# EAGLE board MixerWider2 (EAGLE 5.10)
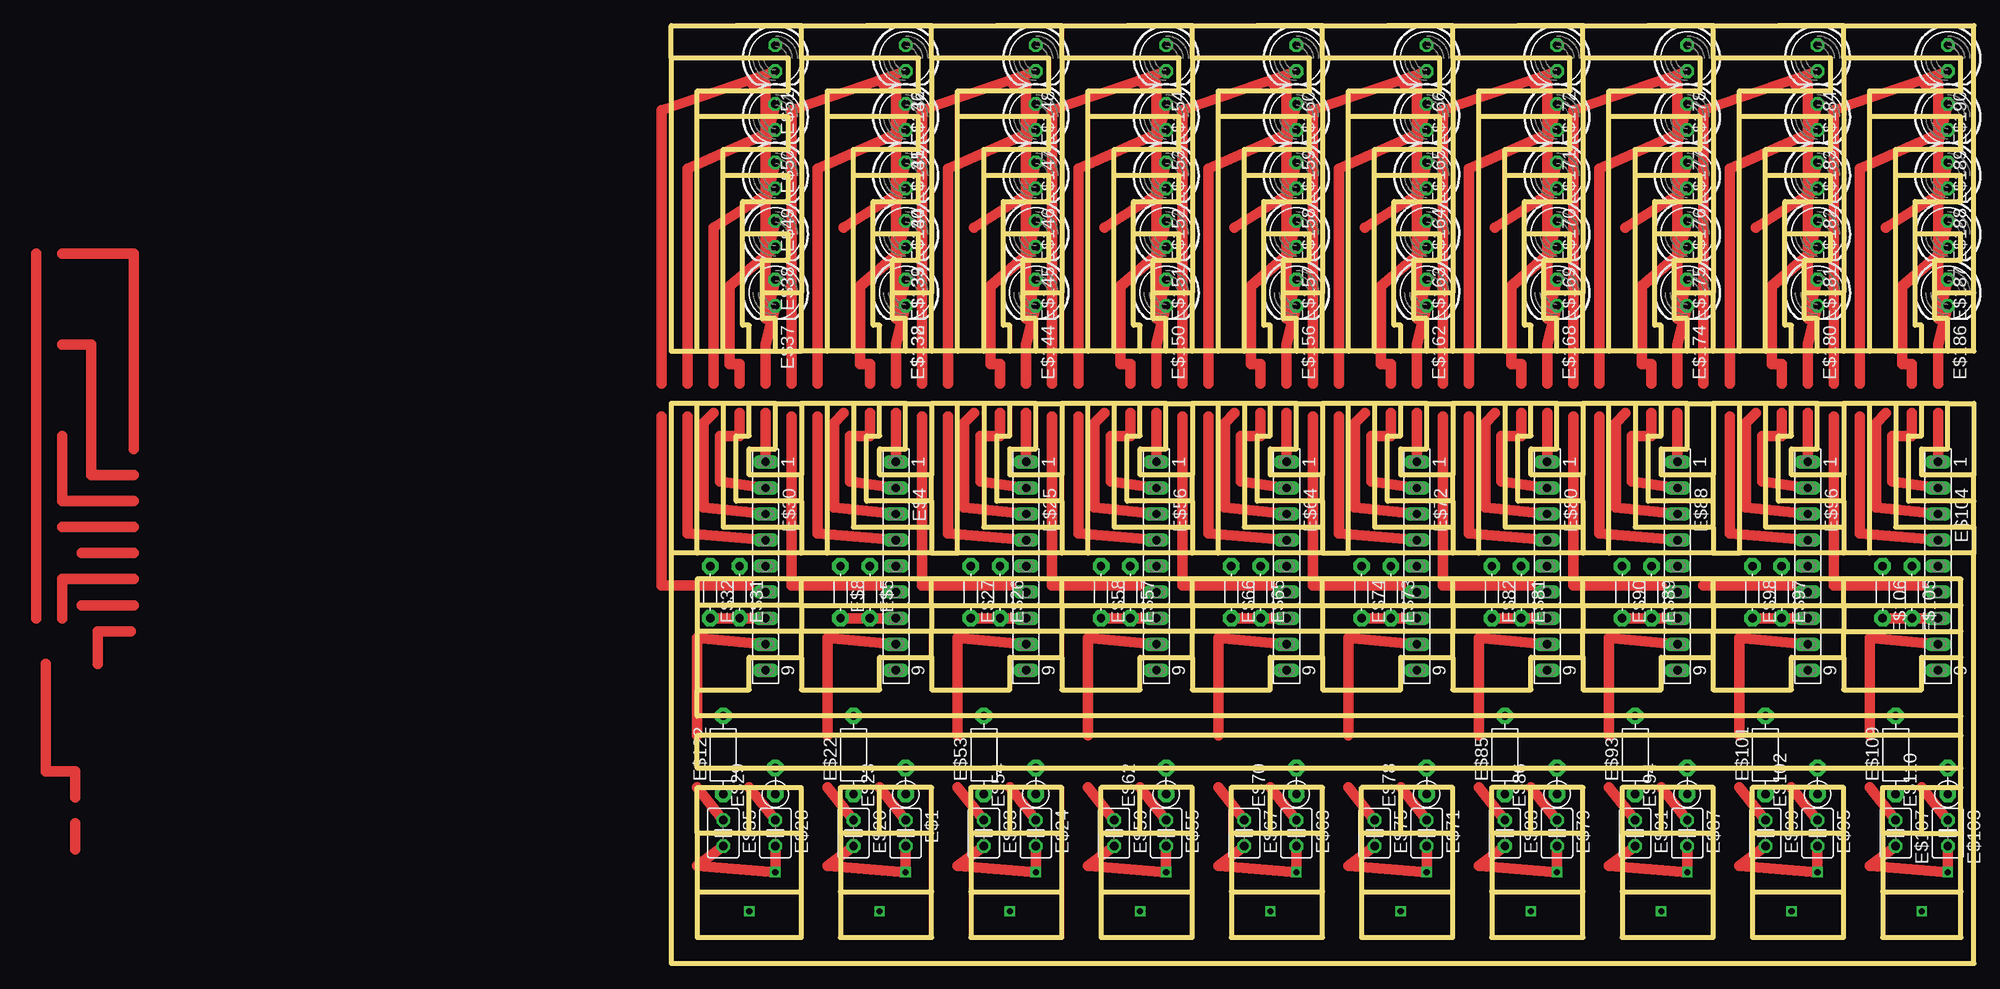
[diagram p0: board, top side]

Size 127 x 91.44 mm. Coordinates in mm from the lower left corner, seen from the top.
Outline: 2.54,59.69 0,59.69 0,88.27
Outline: 2.54,59.69 2.54,82.55
Outline: 2.54,82.55 2.54,85.09 11.43,85.09 11.43,88.27 0,88.27
Outline: 2.54,59.69 5.08,59.69
Outline: 5.08,59.69 5.08,76.83
Outline: 5.08,76.83 5.08,79.38 11.43,79.38 11.43,82.55 2.54,82.55
Outline: 5.08,59.69 7.62,59.69
Outline: 7.62,59.69 7.62,62.23 6.99,62.23 6.99,71.12
Outline: 6.99,71.12 6.99,74.3 11.43,74.3 11.43,76.83 5.08,76.83
Outline: 7.62,59.69 10.16,59.69
Outline: 10.16,59.69 10.16,62.86 8.89,62.86 8.89,65.41
Outline: 8.89,65.41 8.89,68.58 11.43,68.58 11.43,71.12 6.99,71.12
Outline: 10.16,59.69 12.7,59.69
Outline: 12.7,59.69 12.7,65.41
Outline: 6.35,91.44 12.7,91.44 12.7,88.27
Outline: 8.89,65.41 12.7,65.41
Outline: 15.24,59.69 15.24,82.55
Outline: 15.24,82.55 15.24,85.09 24.13,85.09 24.13,88.27 12.7,88.27
Outline: 12.7,88.27 12.7,65.41
Outline: 17.78,59.69 17.78,76.83
Outline: 17.78,76.83 17.78,79.38 24.13,79.38 24.13,82.55 15.24,82.55
Outline: 20.32,59.69 20.32,62.23 19.69,62.23 19.69,71.12
Outline: 19.69,71.12 19.69,74.3 24.13,74.3 24.13,76.83 17.78,76.83
Outline: 22.86,59.69 22.86,62.86 21.59,62.86 21.59,65.41
Outline: 21.59,65.41 21.59,68.58 24.13,68.58 24.13,71.12 19.69,71.12
Outline: 25.4,59.69 25.4,65.41
Outline: 19.05,91.44 25.4,91.44 25.4,88.27
Outline: 21.59,65.41 25.4,65.41
Outline: 27.94,59.69 27.94,82.55
Outline: 27.94,82.55 27.94,85.09 36.83,85.09 36.83,88.27 25.4,88.27
Outline: 25.4,88.27 25.4,65.41
Outline: 30.48,59.69 30.48,76.83
Outline: 30.48,76.83 30.48,79.38 36.83,79.38 36.83,82.55 27.94,82.55
Outline: 33.02,59.69 33.02,62.23 32.38,62.23 32.38,71.12
Outline: 32.38,71.12 32.38,74.3 36.83,74.3 36.83,76.83 30.48,76.83
Outline: 35.56,59.69 35.56,62.86 34.29,62.86 34.29,65.41
Outline: 34.29,65.41 34.29,68.58 36.83,68.58 36.83,71.12 32.38,71.12
Outline: 38.1,59.69 38.1,65.41
Outline: 31.75,91.44 38.1,91.44 38.1,88.27
Outline: 34.29,65.41 38.1,65.41
Outline: 40.64,59.69 40.64,82.55
Outline: 40.64,82.55 40.64,85.09 49.53,85.09 49.53,88.27 38.1,88.27
Outline: 38.1,88.27 38.1,65.41
Outline: 43.18,59.69 43.18,76.83
Outline: 43.18,76.83 43.18,79.38 49.53,79.38 49.53,82.55 40.64,82.55
Outline: 45.72,59.69 45.72,62.23 45.09,62.23 45.09,71.12
Outline: 45.09,71.12 45.09,74.3 49.53,74.3 49.53,76.83 43.18,76.83
Outline: 48.26,59.69 48.26,62.86 46.99,62.86 46.99,65.41
Outline: 46.99,65.41 46.99,68.58 49.53,68.58 49.53,71.12 45.09,71.12
Outline: 50.8,59.69 50.8,65.41
Outline: 44.45,91.44 50.8,91.44 50.8,88.27
Outline: 46.99,65.41 50.8,65.41
Outline: 53.34,59.69 53.34,82.55
Outline: 53.34,82.55 53.34,85.09 62.23,85.09 62.23,88.27 50.8,88.27
Outline: 50.8,88.27 50.8,65.41
Outline: 55.88,59.69 55.88,76.83
Outline: 55.88,76.83 55.88,79.38 62.23,79.38 62.23,82.55 53.34,82.55
Outline: 58.42,59.69 58.42,62.23 57.79,62.23 57.79,71.12
Outline: 57.79,71.12 57.79,74.3 62.23,74.3 62.23,76.83 55.88,76.83
Outline: 60.96,59.69 60.96,62.86 59.69,62.86 59.69,65.41
Outline: 59.69,65.41 59.69,68.58 62.23,68.58 62.23,71.12 57.79,71.12
Outline: 63.5,59.69 63.5,65.41
Outline: 57.15,91.44 63.5,91.44 63.5,88.27
Outline: 59.69,65.41 63.5,65.41
Outline: 66.04,59.69 66.04,82.55
Outline: 66.04,82.55 66.04,85.09 74.93,85.09 74.93,88.27 63.5,88.27
Outline: 63.5,88.27 63.5,65.41
Outline: 68.58,59.69 68.58,76.83
Outline: 68.58,76.83 68.58,79.38 74.93,79.38 74.93,82.55 66.04,82.55
Outline: 71.12,59.69 71.12,62.23 70.48,62.23 70.48,71.12
Outline: 70.48,71.12 70.48,74.3 74.93,74.3 74.93,76.83 68.58,76.83
Outline: 73.66,59.69 73.66,62.86 72.39,62.86 72.39,65.41
Outline: 72.39,65.41 72.39,68.58 74.93,68.58 74.93,71.12 70.48,71.12
Outline: 76.2,59.69 76.2,65.41
Outline: 69.85,91.44 76.2,91.44 76.2,88.27
Outline: 72.39,65.41 76.2,65.41
Outline: 78.74,59.69 78.74,82.55
Outline: 78.74,82.55 78.74,85.09 87.63,85.09 87.63,88.27 76.2,88.27
Outline: 76.2,88.27 76.2,65.41
Outline: 81.28,59.69 81.28,76.83
Outline: 81.28,76.83 81.28,79.38 87.63,79.38 87.63,82.55 78.74,82.55
Outline: 83.82,59.69 83.82,62.23 83.19,62.23 83.19,71.12
Outline: 83.19,71.12 83.19,74.3 87.63,74.3 87.63,76.83 81.28,76.83
Outline: 86.36,59.69 86.36,62.86 85.09,62.86 85.09,65.41
Outline: 85.09,65.41 85.09,68.58 87.63,68.58 87.63,71.12 83.19,71.12
Outline: 88.9,59.69 88.9,65.41
Outline: 82.55,91.44 88.9,91.44 88.9,88.27
Outline: 85.09,65.41 88.9,65.41
Outline: 91.44,59.69 91.44,82.55
Outline: 91.44,82.55 91.44,85.09 100.33,85.09 100.33,88.27 88.9,88.27
Outline: 88.9,88.27 88.9,65.41
Outline: 93.98,59.69 93.98,76.83
Outline: 93.98,76.83 93.98,79.38 100.33,79.38 100.33,82.55 91.44,82.55
Outline: 96.52,59.69 96.52,62.23 95.89,62.23 95.89,71.12
Outline: 95.89,71.12 95.89,74.3 100.33,74.3 100.33,76.83 93.98,76.83
Outline: 99.06,59.69 99.06,62.86 97.79,62.86 97.79,65.41
Outline: 97.79,65.41 97.79,68.58 100.33,68.58 100.33,71.12 95.89,71.12
Outline: 101.6,59.69 101.6,65.41
Outline: 95.25,91.44 101.6,91.44 101.6,88.27
Outline: 97.79,65.41 101.6,65.41
Outline: 104.14,59.69 104.14,82.55
Outline: 104.14,82.55 104.14,85.09 113.03,85.09 113.03,88.27 101.6,88.27
Outline: 101.6,88.27 101.6,65.41
Outline: 106.68,59.69 106.68,76.83
Outline: 106.68,76.83 106.68,79.38 113.03,79.38 113.03,82.55 104.14,82.55
Outline: 109.22,59.69 109.22,62.23 108.59,62.23 108.59,71.12
Outline: 108.59,71.12 108.59,74.3 113.03,74.3 113.03,76.83 106.68,76.83
Outline: 111.76,59.69 111.76,62.86 110.49,62.86 110.49,65.41
Outline: 110.49,65.41 110.49,68.58 113.03,68.58 113.03,71.12 108.59,71.12
Outline: 114.3,59.69 114.3,65.41
Outline: 107.95,91.44 114.3,91.44 114.3,88.27
Outline: 110.49,65.41 114.3,65.41
Outline: 116.84,59.69 116.84,82.55
Outline: 116.84,82.55 116.84,85.09 125.73,85.09 125.73,88.27 114.3,88.27
Outline: 114.3,88.27 114.3,65.41
Outline: 119.38,59.69 119.38,76.83
Outline: 119.38,76.83 119.38,79.38 125.73,79.38 125.73,82.55 116.84,82.55
Outline: 121.92,59.69 121.92,62.23 121.29,62.23 121.29,71.12
Outline: 121.29,71.12 121.29,74.3 125.73,74.3 125.73,76.83 119.38,76.83
Outline: 124.46,59.69 124.46,62.86 123.19,62.86 123.19,65.41
Outline: 123.19,65.41 123.19,68.58 125.73,68.58 125.73,71.12 121.29,71.12
Outline: 127,65.41 127,59.69 12.7,59.69
Outline: 127,65.41 127,91.44 0,91.44 0,88.27
Outline: 123.19,65.41 127,65.41
Outline: 2.54,12.7 2.54,6.98
Outline: 2.54,6.98 12.7,6.98
Outline: 12.7,12.7 7.62,12.7
Outline: 7.62,12.7 2.54,12.7
Outline: 2.54,12.7 2.54,17.14 7.62,17.14
Outline: 7.62,17.14 12.7,17.14 12.7,12.7
Outline: 12.7,29.85 7.62,29.85 7.62,26.67 2.54,26.67
Outline: 12.7,29.85 12.7,32.38
Outline: 12.7,34.92 12.7,37.46
Outline: 12.7,37.46 2.54,37.46 2.54,34.92
Outline: 2.54,40 2.54,54.61
Outline: 2.54,54.61 0,54.61 0,40
Outline: 5.08,54.61 2.54,54.61
Outline: 5.08,54.61 5.08,42.54 12.7,42.54
Outline: 12.7,42.54 12.7,40
Outline: 12.7,40 2.54,40
Outline: 12.7,45.09 6.35,45.09 6.35,51.43 7.62,51.43 7.62,54.61
Outline: 7.62,54.61 5.08,54.61
Outline: 12.7,45.09 12.7,47.62
Outline: 12.7,47.62 7.62,47.62 7.62,50.16 10.16,50.16 10.16,54.61
Outline: 10.16,54.61 7.62,54.61
Outline: 10.16,54.61 12.7,54.61
Outline: 12.7,54.61 12.7,47.62
Outline: 7.62,12.7 7.62,17.14
Outline: 0,40 0,0 127,0 127,40
Outline: 12.7,6.98 12.7,12.7
Outline: 2.54,6.98 2.54,2.54 12.7,2.54 12.7,6.98
Outline: 16.51,12.7 16.51,6.98
Outline: 16.51,6.98 25.4,6.98
Outline: 25.4,12.7 20.32,12.7
Outline: 20.32,12.7 16.51,12.7
Outline: 16.51,12.7 16.51,17.14 20.32,17.14
Outline: 25.4,29.85 20.32,29.85 20.32,26.67 12.7,26.67 12.7,29.85
Outline: 25.4,29.85 25.4,32.38
Outline: 25.4,32.38 12.7,32.38
Outline: 12.7,34.92 25.4,34.92
Outline: 25.4,34.92 25.4,37.46
Outline: 15.24,40 15.24,54.61
Outline: 15.24,54.61 12.7,54.61
Outline: 12.7,45.09 12.7,42.54
Outline: 17.78,54.61 15.24,54.61
Outline: 17.78,54.61 17.78,42.54 25.4,42.54
Outline: 25.4,42.54 25.4,40
Outline: 25.4,40 15.24,40
Outline: 25.4,45.09 19.05,45.09 19.05,51.43 20.32,51.43 20.32,54.61
Outline: 20.32,54.61 17.78,54.61
Outline: 25.4,45.09 25.4,47.62
Outline: 25.4,47.62 20.32,47.62 20.32,50.16 22.86,50.16 22.86,54.61
Outline: 22.86,54.61 20.32,54.61
Outline: 22.86,54.61 25.4,54.61
Outline: 25.4,54.61 25.4,47.62
Outline: 20.32,12.7 20.32,17.14
Outline: 12.7,34.92 12.7,32.38
Outline: 25.4,6.98 25.4,12.7
Outline: 25.4,12.7 25.4,17.14 20.32,17.14
Outline: 16.51,6.98 16.51,2.54 25.4,2.54 25.4,6.98
Outline: 29.21,12.7 29.21,6.98
Outline: 29.21,6.98 38.1,6.98
Outline: 38.1,12.7 33.02,12.7
Outline: 33.02,12.7 29.21,12.7
Outline: 29.21,12.7 29.21,17.14 33.02,17.14
Outline: 38.1,29.85 33.02,29.85 33.02,26.67 25.4,26.67 25.4,29.85
Outline: 38.1,29.85 38.1,32.38
Outline: 38.1,32.38 25.4,32.38
Outline: 25.4,34.92 38.1,34.92
Outline: 38.1,34.92 38.1,37.46
Outline: 27.94,40 27.94,54.61
Outline: 27.94,54.61 25.4,54.61
Outline: 25.4,45.09 25.4,42.54
Outline: 30.48,54.61 27.94,54.61
Outline: 30.48,54.61 30.48,42.54 38.1,42.54
Outline: 38.1,42.54 38.1,40
Outline: 38.1,40 27.94,40
Outline: 38.1,45.09 31.75,45.09 31.75,51.43 33.02,51.43 33.02,54.61
Outline: 33.02,54.61 30.48,54.61
Outline: 38.1,45.09 38.1,47.62
Outline: 38.1,47.62 33.02,47.62 33.02,50.16 35.56,50.16 35.56,54.61
Outline: 35.56,54.61 33.02,54.61
Outline: 35.56,54.61 38.1,54.61
Outline: 38.1,54.61 38.1,47.62
Outline: 33.02,12.7 33.02,17.14
Outline: 25.4,34.92 25.4,32.38
Outline: 38.1,6.98 38.1,12.7
Outline: 38.1,12.7 38.1,17.14 33.02,17.14
Outline: 29.21,6.98 29.21,2.54 38.1,2.54 38.1,6.98
Outline: 41.91,12.7 41.91,6.98
Outline: 41.91,6.98 50.8,6.98
Outline: 50.8,12.7 45.72,12.7
Outline: 45.72,12.7 41.91,12.7
Outline: 41.91,12.7 41.91,17.14 45.72,17.14
Outline: 50.8,29.85 45.72,29.85 45.72,26.67 38.1,26.67 38.1,29.85
Outline: 50.8,29.85 50.8,32.38
Outline: 50.8,32.38 38.1,32.38
Outline: 38.1,34.92 50.8,34.92
Outline: 50.8,34.92 50.8,37.46
Outline: 40.64,40 40.64,54.61
Outline: 40.64,54.61 38.1,54.61
Outline: 38.1,45.09 38.1,42.54
Outline: 43.18,54.61 40.64,54.61
Outline: 43.18,54.61 43.18,42.54 50.8,42.54
Outline: 50.8,42.54 50.8,40
Outline: 50.8,40 40.64,40
Outline: 50.8,45.09 44.45,45.09 44.45,51.43 45.72,51.43 45.72,54.61
Outline: 45.72,54.61 43.18,54.61
Outline: 50.8,45.09 50.8,47.62
Outline: 50.8,47.62 45.72,47.62 45.72,50.16 48.26,50.16 48.26,54.61
Outline: 48.26,54.61 45.72,54.61
Outline: 48.26,54.61 50.8,54.61
Outline: 50.8,54.61 50.8,47.62
Outline: 45.72,12.7 45.72,17.14
Outline: 38.1,34.92 38.1,32.38
Outline: 50.8,6.98 50.8,12.7
Outline: 50.8,12.7 50.8,17.14 45.72,17.14
Outline: 41.91,6.98 41.91,2.54 50.8,2.54 50.8,6.98
Outline: 54.61,12.7 54.61,6.98
Outline: 54.61,6.98 63.5,6.98
Outline: 63.5,12.7 58.42,12.7
Outline: 58.42,12.7 54.61,12.7
Outline: 54.61,12.7 54.61,17.14 58.42,17.14
Outline: 63.5,29.85 58.42,29.85 58.42,26.67 50.8,26.67 50.8,29.85
Outline: 63.5,29.85 63.5,32.38
Outline: 63.5,32.38 50.8,32.38
Outline: 50.8,34.92 63.5,34.92
Outline: 63.5,34.92 63.5,37.46
Outline: 53.34,40 53.34,54.61
Outline: 53.34,54.61 50.8,54.61
Outline: 50.8,45.09 50.8,42.54
Outline: 55.88,54.61 53.34,54.61
Outline: 55.88,54.61 55.88,42.54 63.5,42.54
Outline: 63.5,42.54 63.5,40
Outline: 63.5,40 53.34,40
Outline: 63.5,45.09 57.15,45.09 57.15,51.43 58.42,51.43 58.42,54.61
Outline: 58.42,54.61 55.88,54.61
Outline: 63.5,45.09 63.5,47.62
Outline: 63.5,47.62 58.42,47.62 58.42,50.16 60.96,50.16 60.96,54.61
Outline: 60.96,54.61 58.42,54.61
Outline: 60.96,54.61 63.5,54.61
Outline: 63.5,54.61 63.5,47.62
Outline: 58.42,12.7 58.42,17.14
Outline: 50.8,34.92 50.8,32.38
Outline: 63.5,6.98 63.5,12.7
Outline: 63.5,12.7 63.5,17.14 58.42,17.14
Outline: 54.61,6.98 54.61,2.54 63.5,2.54 63.5,6.98
Outline: 67.31,12.7 67.31,6.98
Outline: 67.31,6.98 76.2,6.98
Outline: 76.2,12.7 71.12,12.7
Outline: 71.12,12.7 67.31,12.7
Outline: 67.31,12.7 67.31,17.14 71.12,17.14
Outline: 76.2,29.85 71.12,29.85 71.12,26.67 63.5,26.67 63.5,29.85
Outline: 76.2,29.85 76.2,32.38
Outline: 76.2,32.38 63.5,32.38
Outline: 63.5,34.92 76.2,34.92
Outline: 76.2,34.92 76.2,37.46
Outline: 66.04,40 66.04,54.61
Outline: 66.04,54.61 63.5,54.61
Outline: 63.5,45.09 63.5,42.54
Outline: 68.58,54.61 66.04,54.61
Outline: 68.58,54.61 68.58,42.54 76.2,42.54
Outline: 76.2,42.54 76.2,40
Outline: 76.2,40 66.04,40
Outline: 76.2,45.09 69.85,45.09 69.85,51.43 71.12,51.43 71.12,54.61
Outline: 71.12,54.61 68.58,54.61
Outline: 76.2,45.09 76.2,47.62
Outline: 76.2,47.62 71.12,47.62 71.12,50.16 73.66,50.16 73.66,54.61
Outline: 73.66,54.61 71.12,54.61
Outline: 73.66,54.61 76.2,54.61
Outline: 76.2,54.61 76.2,47.62
Outline: 71.12,12.7 71.12,17.14
Outline: 63.5,34.92 63.5,32.38
Outline: 76.2,6.98 76.2,12.7
Outline: 76.2,12.7 76.2,17.14 71.12,17.14
Outline: 67.31,6.98 67.31,2.54 76.2,2.54 76.2,6.98
Outline: 80.01,12.7 80.01,6.98
Outline: 80.01,6.98 88.9,6.98
Outline: 88.9,12.7 83.82,12.7
Outline: 83.82,12.7 80.01,12.7
Outline: 80.01,12.7 80.01,17.14 83.82,17.14
Outline: 88.9,29.85 83.82,29.85 83.82,26.67 76.2,26.67 76.2,29.85
Outline: 88.9,29.85 88.9,32.38
Outline: 88.9,32.38 76.2,32.38
Outline: 76.2,34.92 88.9,34.92
Outline: 88.9,34.92 88.9,37.46
Outline: 78.74,40 78.74,54.61
Outline: 78.74,54.61 76.2,54.61
Outline: 76.2,45.09 76.2,42.54
Outline: 81.28,54.61 78.74,54.61
Outline: 81.28,54.61 81.28,42.54 88.9,42.54
Outline: 88.9,42.54 88.9,40
Outline: 88.9,40 78.74,40
Outline: 88.9,45.09 82.55,45.09 82.55,51.43 83.82,51.43 83.82,54.61
Outline: 83.82,54.61 81.28,54.61
Outline: 88.9,45.09 88.9,47.62
Outline: 88.9,47.62 83.82,47.62 83.82,50.16 86.36,50.16 86.36,54.61
Outline: 86.36,54.61 83.82,54.61
Outline: 86.36,54.61 88.9,54.61
Outline: 88.9,54.61 88.9,47.62
Outline: 83.82,12.7 83.82,17.14
Outline: 76.2,34.92 76.2,32.38
Outline: 88.9,6.98 88.9,12.7
Outline: 88.9,12.7 88.9,17.14 83.82,17.14
Outline: 80.01,6.98 80.01,2.54 88.9,2.54 88.9,6.98
Outline: 92.71,12.7 92.71,6.98
Outline: 92.71,6.98 101.6,6.98
Outline: 101.6,12.7 96.52,12.7
Outline: 96.52,12.7 92.71,12.7
Outline: 92.71,12.7 92.71,17.14 96.52,17.14
Outline: 101.6,29.85 96.52,29.85 96.52,26.67 88.9,26.67 88.9,29.85
Outline: 101.6,29.85 101.6,32.38
Outline: 101.6,32.38 88.9,32.38
Outline: 88.9,34.92 101.6,34.92
Outline: 101.6,34.92 101.6,32.38
Outline: 101.6,34.92 101.6,37.46
Outline: 91.44,40 91.44,54.61
Outline: 91.44,54.61 88.9,54.61
Outline: 88.9,45.09 88.9,42.54
Outline: 93.98,54.61 91.44,54.61
Outline: 93.98,54.61 93.98,42.54 101.6,42.54
Outline: 101.6,42.54 101.6,40
Outline: 101.6,40 91.44,40
Outline: 101.6,42.54 101.6,45.09
Outline: 101.6,45.09 95.25,45.09 95.25,51.43 96.52,51.43 96.52,54.61
Outline: 96.52,54.61 93.98,54.61
Outline: 101.6,45.09 101.6,47.62
Outline: 101.6,47.62 96.52,47.62 96.52,50.16 99.06,50.16 99.06,54.61
Outline: 99.06,54.61 96.52,54.61
Outline: 99.06,54.61 101.6,54.61
Outline: 101.6,54.61 101.6,47.62
Outline: 96.52,12.7 96.52,17.14
Outline: 88.9,34.92 88.9,32.38
Outline: 101.6,6.98 101.6,12.7
Outline: 101.6,12.7 101.6,17.14 96.52,17.14
Outline: 92.71,6.98 92.71,2.54 101.6,2.54 101.6,6.98
Outline: 105.41,12.7 105.41,6.98
Outline: 105.41,6.98 114.3,6.98
Outline: 114.3,12.7 109.22,12.7
Outline: 109.22,12.7 105.41,12.7
Outline: 105.41,12.7 105.41,17.14 109.22,17.14
Outline: 114.3,29.85 109.22,29.85 109.22,26.67 101.6,26.67 101.6,29.85
Outline: 114.3,29.85 114.3,32.38
Outline: 114.3,32.38 101.6,32.38
Outline: 101.6,34.92 114.3,34.92
Outline: 114.3,34.92 114.3,37.46
Outline: 106.68,54.61 104.14,54.61
Outline: 106.68,54.61 106.68,42.54 114.3,42.54
Outline: 114.3,42.54 114.3,40
Outline: 114.3,40 104.14,40
Outline: 114.3,45.09 107.95,45.09 107.95,51.43 109.22,51.43 109.22,54.61
Outline: 109.22,54.61 106.68,54.61
Outline: 114.3,45.09 114.3,47.62
Outline: 114.3,47.62 109.22,47.62 109.22,50.16 111.76,50.16 111.76,54.61
Outline: 111.76,54.61 109.22,54.61
Outline: 111.76,54.61 114.3,54.61
Outline: 114.3,54.61 114.3,47.62
Outline: 109.22,12.7 109.22,17.14
Outline: 114.3,6.98 114.3,12.7
Outline: 114.3,12.7 114.3,17.14 109.22,17.14
Outline: 105.41,6.98 105.41,2.54 114.3,2.54 114.3,6.98
Outline: 118.11,12.7 118.11,6.98
Outline: 121.92,12.7 118.11,12.7
Outline: 118.11,12.7 118.11,17.14 121.92,17.14
Outline: 121.92,17.14 125.73,17.14
Outline: 116.84,40 116.84,54.61
Outline: 116.84,54.61 114.3,54.61
Outline: 114.3,45.09 114.3,42.54
Outline: 119.38,54.61 116.84,54.61
Outline: 119.38,54.61 119.38,42.54 127,42.54
Outline: 127,42.54 127,40
Outline: 127,40 116.84,40
Outline: 127,42.54 127,45.09
Outline: 127,45.09 120.65,45.09 120.65,51.43 121.92,51.43 121.92,54.61
Outline: 121.92,54.61 119.38,54.61
Outline: 127,45.09 127,47.62
Outline: 127,47.62 121.92,47.62 121.92,50.16 124.46,50.16 124.46,54.61
Outline: 124.46,54.61 121.92,54.61
Outline: 124.46,54.61 127,54.61 127,47.62
Outline: 121.92,12.7 121.92,17.14
Outline: 114.3,34.92 114.3,32.38
Outline: 114.3,29.85 114.3,26.67 121.92,26.67 121.92,29.85 125.73,29.85
Outline: 125.73,22.23 2.54,22.23 2.54,19.05 125.73,19.05
Outline: 118.11,6.98 118.11,2.54 125.73,2.54 125.73,6.98
Outline: 104.14,54.61 101.6,54.61
Outline: 125.73,6.98 125.73,12.7
Outline: 125.73,12.7 125.73,17.14
Outline: 118.11,6.98 125.73,6.98
Outline: 121.92,12.7 125.73,12.7
Outline: 125.73,17.14 125.73,19.05
Outline: 125.73,19.05 125.73,22.23
Outline: 125.73,22.23 125.73,24.13
Outline: 125.73,24.13 125.73,29.85
Outline: 125.73,29.85 125.73,32.38
Outline: 125.73,32.38 125.73,34.92
Outline: 125.73,34.92 125.73,37.46 114.3,37.46
Outline: 114.3,34.92 125.73,34.92
Outline: 114.3,32.38 125.73,32.38
Outline: 116.84,40 114.3,40
Outline: 114.3,37.46 101.6,37.46
Outline: 101.6,40 104.14,40
Outline: 104.14,54.61 104.14,40
Outline: 91.44,40 88.9,40
Outline: 101.6,37.46 88.9,37.46
Outline: 88.9,37.46 76.2,37.46
Outline: 78.74,40 76.2,40
Outline: 63.5,40 66.04,40
Outline: 76.2,37.46 63.5,37.46
Outline: 53.34,40 50.8,40
Outline: 63.5,37.46 50.8,37.46
Outline: 40.64,40 38.1,40
Outline: 50.8,37.46 38.1,37.46
Outline: 38.1,37.46 25.4,37.46
Outline: 25.4,40 27.94,40
Outline: 25.4,37.46 12.7,37.46
Outline: 15.24,40 12.7,40
Outline: 2.54,40 0,40
Outline: 2.54,34.92 2.54,32.38
Outline: 2.54,32.38 2.54,26.67
Outline: 12.7,32.38 2.54,32.38
Outline: 12.7,34.92 2.54,34.92
Outline: 125.73,24.13 2.54,24.13 2.54,26.67
Copper layers (1*16): Top 0.035mm / dielectric 1.5mm / Bottom 0.035mm
Design rules "default": minimum track width 10mil, minimum drill 24mil, track to track 8mil, track to pad 8mil, pad to pad 8mil, via to via 8mil, smd to smd 8mil, copper to edge 40mil, drill to drill 8mil, minimum pad ring 10mil, minimum via ring 8mil, stop-mask expansion 4mil, vias tented up to drill 0mil, thermal gap 10mil

## Footprints (pad centres in the part's own frame; a part is rotated, then mirrored left to right if it is on the bottom)
C025-030X050 = drill 0.813 octagon: 1 -1.27,0; 2 1.27,0
FE09 = drill 0.813 long: 1 -10.16,0; 2 -7.62,0; 3 -5.08,0; 4 -2.54,0; 5 0,0; 6 2.54,0; 7 5.08,0; 8 7.62,0; 9 10.16,0
R-5 = drill 0.813 pad 1.6 octagon: 1 -2.54,0; 2 2.54,0
R-7,5 = drill 0.813 pad 1.6 octagon: 1 -3.81,0; 2 3.81,0
RS-2,5 = drill 0.813 pad 1.6 octagon: 1 -1.27,0; 2 1.27,0
LED5MM = drill 0.813 octagon: A -1.27,0; K 1.27,0

## Placement (x,y rotation side)
E$1  [C025-030X050]  22.86,12.7 270 top
E$4  [FE09]  21.91,38.73 270 top
E$5  [R-5]  19.37,36.2 270 top
E$8  [R-5]  16.51,36.2 270 top
E$20  [C025-030X050]  17.78,12.7 270 top
E$22  [R-7,5]  17.78,20.32 90 top
E$23  [RS-2,5]  22.86,17.78 90 top
E$24  [C025-030X050]  35.56,12.7 270 top
E$25  [FE09]  34.61,38.73 270 top
E$26  [R-5]  32.07,36.2 270 top
E$27  [R-5]  29.21,36.2 270 top
E$28  [C025-030X050]  10.16,12.7 270 top
E$29  [RS-2,5]  10.16,17.78 90 top
E$30  [FE09]  9.21,38.73 270 top
E$31  [R-5]  6.67,36.2 270 top
E$32  [R-5]  3.81,36.2 270 top
E$33  [C025-030X050]  30.48,12.7 270 top
E$35  [C025-030X050]  5.08,12.7 270 top
E$37  [LED5MM]  10.16,65.41 270 top
E$38  [LED5MM]  10.16,71.12 270 top
E$49  [LED5MM]  10.16,76.83 270 top
E$50  [LED5MM]  10.16,82.55 270 top
E$51  [LED5MM]  10.16,88.27 270 top
E$53  [R-7,5]  30.48,20.32 90 top
E$54  [RS-2,5]  35.56,17.78 90 top
E$55  [C025-030X050]  48.26,12.7 270 top
E$56  [FE09]  47.31,38.73 270 top
E$57  [R-5]  44.77,36.2 270 top
E$58  [R-5]  41.91,36.2 270 top
E$59  [C025-030X050]  43.18,12.7 270 top
E$62  [RS-2,5]  48.26,17.78 90 top
E$63  [C025-030X050]  60.96,12.7 270 top
E$64  [FE09]  60.01,38.73 270 top
E$65  [R-5]  57.47,36.2 270 top
E$66  [R-5]  54.61,36.2 270 top
E$67  [C025-030X050]  55.88,12.7 270 top
E$70  [RS-2,5]  60.96,17.78 90 top
E$71  [C025-030X050]  73.66,12.7 270 top
E$72  [FE09]  72.71,38.73 270 top
E$73  [R-5]  70.17,36.2 270 top
E$74  [R-5]  67.31,36.2 270 top
E$75  [C025-030X050]  68.58,12.7 270 top
E$78  [RS-2,5]  73.66,17.78 90 top
E$79  [C025-030X050]  86.36,12.7 270 top
E$80  [FE09]  85.41,38.73 270 top
E$81  [R-5]  82.87,36.2 270 top
E$82  [R-5]  80.01,36.2 270 top
E$83  [C025-030X050]  81.28,12.7 270 top
E$85  [R-7,5]  81.28,20.32 90 top
E$86  [RS-2,5]  86.36,17.78 90 top
E$87  [C025-030X050]  99.06,12.7 270 top
E$88  [FE09]  98.11,38.73 270 top
E$89  [R-5]  95.57,36.2 270 top
E$90  [R-5]  92.71,36.2 270 top
E$91  [C025-030X050]  93.98,12.7 270 top
E$93  [R-7,5]  93.98,20.32 90 top
E$94  [RS-2,5]  99.06,17.78 90 top
E$95  [C025-030X050]  111.76,12.7 270 top
E$96  [FE09]  110.81,38.73 270 top
E$97  [R-5]  108.27,36.2 270 top
E$98  [R-5]  105.41,36.2 270 top
E$99  [C025-030X050]  106.68,12.7 270 top
E$101  [R-7,5]  106.68,20.32 90 top
E$102  [RS-2,5]  111.76,17.78 90 top
E$103  [C025-030X050]  124.46,12.7 270 top
E$104  [FE09]  123.51,38.73 270 top
E$105  [R-5]  120.97,36.2 270 top
E$106  [R-5]  118.11,36.2 270 top
E$107  [C025-030X050]  119.38,12.7 270 top
E$109  [R-7,5]  119.38,20.32 90 top
E$110  [RS-2,5]  124.46,17.78 90 top
E$122  [R-7,5]  5.08,20.32 90 top
E$132  [LED5MM]  22.86,65.41 270 top
E$133  [LED5MM]  22.86,71.12 270 top
E$134  [LED5MM]  22.86,76.83 270 top
E$135  [LED5MM]  22.86,82.55 270 top
E$136  [LED5MM]  22.86,88.27 270 top
E$138  [LED5MM]  22.86,65.41 270 top
E$139  [LED5MM]  22.86,71.12 270 top
E$140  [LED5MM]  22.86,76.83 270 top
E$141  [LED5MM]  22.86,82.55 270 top
E$142  [LED5MM]  22.86,88.27 270 top
E$144  [LED5MM]  35.56,65.41 270 top
E$145  [LED5MM]  35.56,71.12 270 top
E$146  [LED5MM]  35.56,76.83 270 top
E$147  [LED5MM]  35.56,82.55 270 top
E$148  [LED5MM]  35.56,88.27 270 top
E$150  [LED5MM]  48.26,65.41 270 top
E$151  [LED5MM]  48.26,71.12 270 top
E$152  [LED5MM]  48.26,76.83 270 top
E$153  [LED5MM]  48.26,82.55 270 top
E$154  [LED5MM]  48.26,88.27 270 top
E$156  [LED5MM]  60.96,65.41 270 top
E$157  [LED5MM]  60.96,71.12 270 top
E$158  [LED5MM]  60.96,76.83 270 top
E$159  [LED5MM]  60.96,82.55 270 top
E$160  [LED5MM]  60.96,88.27 270 top
E$162  [LED5MM]  73.66,65.41 270 top
E$163  [LED5MM]  73.66,71.12 270 top
E$164  [LED5MM]  73.66,76.83 270 top
E$165  [LED5MM]  73.66,82.55 270 top
E$166  [LED5MM]  73.66,88.27 270 top
E$168  [LED5MM]  86.36,65.41 270 top
E$169  [LED5MM]  86.36,71.12 270 top
E$170  [LED5MM]  86.36,76.83 270 top
E$171  [LED5MM]  86.36,82.55 270 top
E$172  [LED5MM]  86.36,88.27 270 top
E$174  [LED5MM]  99.06,65.41 270 top
E$175  [LED5MM]  99.06,71.12 270 top
E$176  [LED5MM]  99.06,76.83 270 top
E$177  [LED5MM]  99.06,82.55 270 top
E$178  [LED5MM]  99.06,88.27 270 top
E$180  [LED5MM]  111.76,65.41 270 top
E$181  [LED5MM]  111.76,71.12 270 top
E$182  [LED5MM]  111.76,76.83 270 top
E$183  [LED5MM]  111.76,82.55 270 top
E$184  [LED5MM]  111.76,88.27 270 top
E$186  [LED5MM]  124.46,65.41 270 top
E$187  [LED5MM]  124.46,71.12 270 top
E$188  [LED5MM]  124.46,76.83 270 top
E$189  [LED5MM]  124.46,82.55 270 top
E$190  [LED5MM]  124.46,88.27 270 top

## Library data of the parts
E$1 E$20 E$24 E$28 E$33 E$35 E$55 E$59 E$63 E$67 E$71 E$75 E$79 E$83 E$87 E$91 E$95 E$99 E$103 E$107 = rcl
E$4 E$25 E$30 E$56 E$64 E$72 E$80 E$88 E$96 E$104 = con-lsta
E$5 E$8 E$22 E$23 E$26 E$27 E$29 E$31 E$32 E$53 E$54 E$57 E$58 E$62 E$65 E$66 E$70 E$73 E$74 E$78 E$81 E$82 E$85 E$86 E$89 E$90 E$93 E$94 E$97 E$98 E$101 E$102 E$105 E$106 E$109 E$110 E$122 = discrete
E$37 E$38 E$49-E$51 E$132-E$136 E$138-E$142 E$144-E$148 E$150-E$154 E$156-E$160 E$162-E$166 E$168-E$172 E$174-E$178 E$180-E$184 E$186-E$190 = led

## Nets
S$1: E$30.1
S$2: E$30.2
S$3: E$30.3
S$5: E$1.1
S$6: E$4.8
S$7: E$4.7 E$5.2 E$8.2
S$8: E$20.1
S$9: E$1.2 E$20.2
S$11: E$4.4
S$12: E$4.1
S$13: E$4.2
S$14: E$4.3
S$16: E$24.1
S$17: E$25.8
S$18: E$25.7 E$26.2 E$27.2
S$19: E$33.1
S$20: E$24.2 E$33.2
S$22: E$25.4
S$23: E$25.1
S$25: E$25.2
S$26: E$25.3
S$28: E$55.1
S$29: E$56.8
S$30: E$56.7 E$57.2 E$58.2
S$31: E$59.1
S$32: E$55.2 E$59.2
S$34: E$56.4
S$35: E$56.1
S$36: E$56.2
S$37: E$56.3
S$39: E$63.1
S$40: E$64.8
S$41: E$64.7 E$65.2 E$66.2
S$42: E$67.1
S$43: E$63.2 E$67.2
S$45: E$28.1
S$46: E$30.8
S$47: E$30.7 E$31.2 E$32.2
S$48: E$35.1
S$49: E$28.2 E$35.2
S$51: E$30.4
S$53: E$64.4
S$54: E$64.1
S$56: E$37.A E$38.A E$49.A E$50.A
S$58: E$64.2
S$59: E$64.3
S$71: E$71.1
S$72: E$72.8
S$73: E$72.7 E$73.2 E$74.2
S$74: E$75.1
S$75: E$71.2 E$75.2
S$77: E$72.4
S$78: E$72.1
S$79: E$72.2
S$80: E$72.3
S$82: E$79.1
S$83: E$80.8
S$84: E$80.7 E$81.2 E$82.2
S$85: E$83.1
S$86: E$79.2 E$83.2
S$88: E$80.4
S$89: E$80.1
S$90: E$80.2
S$91: E$80.3
S$93: E$87.1
S$94: E$88.8
S$95: E$88.7 E$89.2 E$90.2
S$96: E$91.1
S$97: E$87.2 E$91.2
S$99: E$88.4
S$100: E$88.1
S$101: E$88.2
S$102: E$88.3
S$104: E$95.1
S$105: E$96.8
S$106: E$96.7 E$97.2 E$98.2
S$107: E$99.1
S$108: E$95.2 E$99.2
S$110: E$96.4
S$111: E$96.1
S$112: E$96.2
S$113: E$96.3
S$115: E$103.1
S$116: E$104.8
S$117: E$104.7 E$105.2 E$106.2
S$118: E$107.1
S$119: E$103.2 E$107.2
S$121: E$104.4
S$122: E$104.1
S$123: E$104.2
S$124: E$104.3
S$135: E$37.K
S$136: E$38.K
S$137: E$49.K
S$138: E$50.K
S$139: E$51.K
S$140: E$132.A E$133.A E$134.A E$135.A
S$141: E$132.K
S$142: E$133.K
S$143: E$134.K
S$144: E$135.K
S$145: E$136.K
S$146: E$138.A E$139.A E$140.A E$141.A
S$147: E$138.K
S$148: E$139.K
S$149: E$140.K
S$150: E$141.K
S$151: E$142.K
S$152: E$144.A E$145.A E$146.A E$147.A
S$153: E$144.K
S$154: E$145.K
S$155: E$146.K
S$156: E$147.K
S$157: E$148.K
S$158: E$150.A E$151.A E$152.A E$153.A
S$159: E$150.K
S$160: E$151.K
S$161: E$152.K
S$162: E$153.K
S$163: E$154.K
S$164: E$156.A E$157.A E$158.A E$159.A
S$165: E$156.K
S$166: E$157.K
S$167: E$158.K
S$168: E$159.K
S$169: E$160.K
S$170: E$162.A E$163.A E$164.A E$165.A
S$171: E$162.K
S$172: E$163.K
S$173: E$164.K
S$174: E$165.K
S$175: E$166.K
S$176: E$168.A E$169.A E$170.A E$171.A
S$177: E$168.K
S$178: E$169.K
S$179: E$170.K
S$180: E$171.K
S$181: E$172.K
S$182: E$174.A E$175.A E$176.A E$177.A
S$183: E$174.K
S$184: E$175.K
S$185: E$176.K
S$186: E$177.K
S$187: E$178.K
S$188: E$180.A E$181.A E$182.A E$183.A
S$189: E$180.K
S$190: E$181.K
S$191: E$182.K
S$192: E$183.K
S$193: E$184.K
S$194: E$186.A E$187.A E$188.A E$189.A
S$195: E$186.K
S$196: E$187.K
S$197: E$188.K
S$198: E$189.K
S$199: E$190.K

## Tracks (layer width: path | path; a pad name or v marks a point on that pad's centre or on a via)
S$1
  Top 1.016: E$30.1 9.21,53.66
S$2
  Top 1.016: 6.67,53.66 6.67,51.43 4.76,51.43 4.76,46.99 E$30.2
S$3
  Top 1.016: 4.13,53.66 3.18,52.7 3.18,44.45 E$30.3
S$4  (via drill 0.6)
  other vias: 20.32,5.08
S$5
  Top 1.016: E$1.1 20.32,17.14
S$6
  Top 1.016: E$4.8 15.24,31.75 15.24,22.23
S$7
  Top 1.016: E$8.2 E$5.2 E$4.7
S$8
  Top 1.016: E$20.1 15.24,17.14
S$9  (via drill 0.6)
  Top 1.016: E$20.2 15.24,9.53 v22.86,8.89 E$1.2
S$10
  Top 1.016: 20.32,36.83 11.75,36.83 11.75,53.34
S$11
  Top 1.016: E$4.4 14.29,41.91 14.29,53.34
S$12
  Top 1.016: E$4.1 21.91,53.66
S$13
  Top 1.016: 19.37,53.66 19.37,51.43 17.46,51.43 17.46,46.99 E$4.2
S$14
  Top 1.016: 16.83,53.66 15.88,52.7 15.88,44.45 E$4.3
S$15  (via drill 0.6)
  other vias: 33.02,5.08
S$16
  Top 1.016: E$24.1 33.02,17.14
S$17
  Top 1.016: E$25.8 27.94,31.75 27.94,22.23
S$18
  Top 1.016: E$27.2 E$26.2 E$25.7
S$19
  Top 1.016: E$33.1 27.94,17.14
S$20  (via drill 0.6)
  Top 1.016: E$33.2 27.94,9.53 v35.56,8.89 E$24.2
S$21
  Top 1.016: 33.02,36.83 24.45,36.83 24.45,53.34
S$22
  Top 1.016: E$25.4 26.99,41.91 26.99,53.34
S$23
  Top 1.016: E$25.1 34.61,53.66
S$25
  Top 1.016: 32.07,53.66 32.07,51.43 30.16,51.43 30.16,46.99 E$25.2
S$26
  Top 1.016: 29.53,53.66 28.57,52.7 28.57,44.45 E$25.3
S$27  (via drill 0.6)
  other vias: 45.72,5.08
S$28
  Top 1.016: E$55.1 45.72,17.14
S$29
  Top 1.016: E$56.8 40.64,31.75 40.64,22.23
S$30
  Top 1.016: E$58.2 E$57.2 E$56.7
S$31
  Top 1.016: E$59.1 40.64,17.14
S$32  (via drill 0.6)
  Top 1.016: E$59.2 40.64,9.53 v48.26,8.89 E$55.2
S$33
  Top 1.016: 45.72,36.83 37.15,36.83 37.15,53.34
S$34
  Top 1.016: E$56.4 39.69,41.91 39.69,53.34
S$35
  Top 1.016: E$56.1 47.31,53.66
S$36
  Top 1.016: 44.77,53.66 44.77,51.43 42.86,51.43 42.86,46.99 E$56.2
S$37
  Top 1.016: 42.23,53.66 41.27,52.7 41.27,44.45 E$56.3
S$38  (via drill 0.6)
  other vias: 58.42,5.08
S$39
  Top 1.016: E$63.1 58.42,17.14
S$40
  Top 1.016: E$64.8 53.34,31.75 53.34,22.23
S$41
  Top 1.016: E$66.2 E$65.2 E$64.7
S$42
  Top 1.016: E$67.1 53.34,17.14
S$43  (via drill 0.6)
  Top 1.016: E$67.2 53.34,9.53 v60.96,8.89 E$63.2
S$44  (via drill 0.6)
  other vias: 7.62,5.08
S$45
  Top 1.016: E$28.1 7.62,17.14
S$46
  Top 1.016: E$30.8 2.54,31.75 2.54,22.23
S$47
  Top 1.016: E$32.2 E$31.2 E$30.7
S$48
  Top 1.016: E$35.1 2.54,17.14
S$49  (via drill 0.6)
  Top 1.016: E$35.2 2.54,9.53 v10.16,8.89 E$28.2
S$50
  Top 1.016: 7.62,36.83 -0.95,36.83 -0.95,53.34
S$51
  Top 1.016: E$30.4 1.59,41.91 1.59,53.34
S$52
  Top 1.016: 58.42,36.83 49.85,36.83 49.85,53.34
S$53
  Top 1.016: E$64.4 52.39,41.91 52.39,53.34
S$54
  Top 1.016: E$64.1 60.01,53.66
S$56
  Top 1.016: 7.94,85.72 9.21,85.72 9.21,80.01 | 9.21,80.01 9.21,74.3 | 9.21,74.3 9.21,68.58 | 9.21,68.58 9.21,62.86 E$37.A | E$38.A 9.21,68.58 | E$49.A 9.21,74.3 | E$50.A 9.21,80.01
S$57
  Top 1.016: -58.1,13.65 -58.1,11.11
S$58
  Top 1.016: 57.47,53.66 57.47,51.43 55.56,51.43 55.56,46.99 E$64.2
S$59
  Top 1.016: 54.93,53.66 53.98,52.7 53.98,44.45 E$64.3
S$60  (via drill 0.6)
  other vias: 71.12,5.08
S$61
  Top 1.016: -59.37,69.22 -52.39,69.22 -52.39,50.16
S$62
  Top 1.016: -52.39,47.62 -56.52,47.62 -56.52,60.33 -59.37,60.33
S$63
  Top 1.016: -59.37,51.43 -59.37,45.09 -52.39,45.09
S$64
  Top 1.016: -52.39,42.54 -59.37,42.54
S$65
  Top 1.016: -59.37,33.66 -59.37,37.46 -52.39,37.46
S$66
  Top 1.016: -52.39,40 -54.93,40 -57.47,40
S$67
  Top 1.016: -61.91,33.66 -61.91,69.22
S$68
  Top 1.016: -52.39,34.92 -54.93,34.92 -57.47,34.92
S$69
  Top 1.016: -52.7,32.38 -55.88,32.38 -55.88,29.21
S$70
  Top 1.016: -58.1,16.19 -58.1,18.73 -60.96,18.73 -60.96,29.21
S$71
  Top 1.016: E$71.1 71.12,17.14
S$72
  Top 1.016: E$72.8 66.04,31.75 66.04,22.23
S$73
  Top 1.016: E$74.2 E$73.2 E$72.7
S$74
  Top 1.016: E$75.1 66.04,17.14
S$75  (via drill 0.6)
  Top 1.016: E$75.2 66.04,9.53 v73.66,8.89 E$71.2
S$76
  Top 1.016: 71.12,36.83 62.55,36.83 62.55,53.34
S$77
  Top 1.016: E$72.4 65.09,41.91 65.09,53.34
S$78
  Top 1.016: E$72.1 72.71,53.66
S$79
  Top 1.016: 70.17,53.66 70.17,51.43 68.26,51.43 68.26,46.99 E$72.2
S$80
  Top 1.016: 67.63,53.66 66.68,52.7 66.68,44.45 E$72.3
S$81  (via drill 0.6)
  other vias: 83.82,5.08
S$82
  Top 1.016: E$79.1 83.82,17.14
S$83
  Top 1.016: E$80.8 78.74,31.75 78.74,22.23
S$84
  Top 1.016: E$82.2 E$81.2 E$80.7
S$85
  Top 1.016: E$83.1 78.74,17.14
S$86  (via drill 0.6)
  Top 1.016: E$83.2 78.74,9.53 v86.36,8.89 E$79.2
S$87
  Top 1.016: 83.82,36.83 75.25,36.83 75.25,53.34
S$88
  Top 1.016: E$80.4 77.79,41.91 77.79,53.34
S$89
  Top 1.016: E$80.1 85.41,53.66
S$90
  Top 1.016: 82.87,53.66 82.87,51.43 80.96,51.43 80.96,46.99 E$80.2
S$91
  Top 1.016: 80.33,53.66 79.38,52.7 79.38,44.45 E$80.3
S$92  (via drill 0.6)
  other vias: 96.52,5.08
S$93
  Top 1.016: E$87.1 96.52,17.14
S$94
  Top 1.016: E$88.8 91.44,31.75 91.44,22.23
S$95
  Top 1.016: E$90.2 E$89.2 E$88.7
S$96
  Top 1.016: E$91.1 91.44,17.14
S$97  (via drill 0.6)
  Top 1.016: E$91.2 91.44,9.53 v99.06,8.89 E$87.2
S$98
  Top 1.016: 96.52,36.83 87.95,36.83 87.95,53.34
S$99
  Top 1.016: E$88.4 90.49,41.91 90.49,53.34
S$100
  Top 1.016: E$88.1 98.11,53.66
S$101
  Top 1.016: 95.57,53.66 95.57,51.43 93.66,51.43 93.66,46.99 E$88.2
S$102
  Top 1.016: 93.03,53.66 92.08,52.7 92.08,44.45 E$88.3
S$103  (via drill 0.6)
  other vias: 109.22,5.08
S$104
  Top 1.016: E$95.1 109.22,17.14
S$105
  Top 1.016: E$96.8 104.14,31.75 104.14,22.23
S$106
  Top 1.016: E$98.2 E$97.2 E$96.7
S$107
  Top 1.016: E$99.1 104.14,17.14
S$108  (via drill 0.6)
  Top 1.016: E$99.2 104.14,9.53 v111.76,8.89 E$95.2
S$109
  Top 1.016: 100.65,36.83 109.22,36.83
S$110
  Top 1.016: E$96.4 103.19,41.91 103.19,53.34
S$111
  Top 1.016: E$96.1 110.81,53.66
S$112
  Top 1.016: 108.27,53.66 108.27,51.43 106.36,51.43 106.36,46.99 E$96.2
S$113
  Top 1.016: 105.73,53.66 104.78,52.7 104.78,44.45 E$96.3
S$114  (via drill 0.6)
  other vias: 121.92,5.08
S$115
  Top 1.016: E$103.1 121.92,17.14
S$116
  Top 1.016: E$104.8 116.84,31.75 116.84,22.23
S$117
  Top 1.016: E$106.2 E$105.2 E$104.7
S$118
  Top 1.016: E$107.1 116.84,17.14
S$119  (via drill 0.6)
  Top 1.016: E$107.2 116.84,9.53 v124.46,8.89 E$103.2
S$120
  Top 1.016: 121.92,36.83 113.35,36.83 113.35,53.34
S$121
  Top 1.016: E$104.4 115.89,41.91 115.89,53.34
S$122
  Top 1.016: E$104.1 123.51,53.66
S$123
  Top 1.016: 120.97,53.66 120.97,51.43 119.06,51.43 119.06,46.99 E$104.2
S$124
  Top 1.016: 118.43,53.66 117.48,52.7 117.48,44.45 E$104.3
S$135
  Top 1.016: 9.21,56.52 9.21,60.33 E$37.K
S$136
  Top 1.016: 6.67,56.52 6.67,58.42 5.71,58.42 5.71,66.04 E$38.K
S$137
  Top 1.016: 4.13,56.52 4.13,71.75 E$49.K
S$138
  Top 1.016: 1.59,56.52 1.59,77.47 E$50.K
S$139
  Top 1.016: -0.95,56.52 -0.95,83.19 E$51.K
S$140
  Top 1.016: 20.64,85.72 21.91,85.72 21.91,80.01 | 21.91,80.01 21.91,74.3 | 21.91,74.3 21.91,68.58 | 21.91,68.58 21.91,62.86 E$132.A | E$133.A 21.91,68.58 | E$134.A 21.91,74.3 | E$135.A 21.91,80.01
S$141
  Top 1.016: 21.91,56.52 21.91,60.33 E$132.K
S$142
  Top 1.016: 19.37,56.52 19.37,58.42 18.41,58.42 18.41,66.04 E$133.K
S$143
  Top 1.016: 16.83,71.75 E$134.K
S$144
  Top 1.016: 14.29,56.52 14.29,77.47 E$135.K
S$145
  Top 1.016: 11.75,56.52 11.75,83.19 E$136.K
S$146
  Top 1.016: 20.64,85.72 21.91,85.72 21.91,80.01 | 21.91,80.01 21.91,74.3 | 21.91,74.3 21.91,68.58 | 21.91,68.58 21.91,62.86 E$138.A | E$139.A 21.91,68.58 | E$140.A 21.91,74.3 | E$141.A 21.91,80.01
S$147
  Top 1.016: 21.91,56.52 21.91,60.33 E$138.K
S$148
  Top 1.016: 19.37,56.52 19.37,58.42 18.41,58.42 18.41,66.04 E$139.K
S$149
  Top 1.016: 16.83,71.75 E$140.K
S$150
  Top 1.016: 14.29,56.52 14.29,77.47 E$141.K
S$151
  Top 1.016: 11.75,56.52 11.75,83.19 E$142.K
S$152
  Top 1.016: 33.34,85.72 34.61,85.72 34.61,80.01 | 34.61,80.01 34.61,74.3 | 34.61,74.3 34.61,68.58 | 34.61,68.58 34.61,62.86 E$144.A | E$145.A 34.61,68.58 | E$146.A 34.61,74.3 | E$147.A 34.61,80.01
S$153
  Top 1.016: 34.61,56.52 34.61,60.33 E$144.K
S$154
  Top 1.016: 32.07,56.52 32.07,58.42 31.12,58.42 31.12,66.04 E$145.K
S$155
  Top 1.016: 29.53,71.75 E$146.K
S$156
  Top 1.016: 26.99,56.52 26.99,77.47 E$147.K
S$157
  Top 1.016: 24.45,56.52 24.45,83.19 E$148.K
S$158
  Top 1.016: 46.04,85.72 47.31,85.72 47.31,80.01 | 47.31,80.01 47.31,74.3 | 47.31,74.3 47.31,68.58 | 47.31,68.58 47.31,62.86 E$150.A | E$151.A 47.31,68.58 | E$152.A 47.31,74.3 | E$153.A 47.31,80.01
S$159
  Top 1.016: 47.31,56.52 47.31,60.33 E$150.K
S$160
  Top 1.016: 44.77,56.52 44.77,58.42 43.81,58.42 43.81,66.04 E$151.K
S$161
  Top 1.016: 42.23,71.75 E$152.K
S$162
  Top 1.016: 39.69,56.52 39.69,77.47 E$153.K
S$163
  Top 1.016: 37.15,56.52 37.15,83.19 E$154.K
S$164
  Top 1.016: 58.74,85.72 60.01,85.72 60.01,80.01 | 60.01,80.01 60.01,74.3 | 60.01,74.3 60.01,68.58 | 60.01,68.58 60.01,62.86 E$156.A | E$157.A 60.01,68.58 | E$158.A 60.01,74.3 | E$159.A 60.01,80.01
S$165
  Top 1.016: 60.01,56.52 60.01,60.33 E$156.K
S$166
  Top 1.016: 57.47,56.52 57.47,58.42 56.52,58.42 56.52,66.04 E$157.K
S$167
  Top 1.016: 54.93,71.75 E$158.K
S$168
  Top 1.016: 52.39,56.52 52.39,77.47 E$159.K
S$169
  Top 1.016: 49.85,56.52 49.85,83.19 E$160.K
S$170
  Top 1.016: 71.44,85.72 72.71,85.72 72.71,80.01 | 72.71,80.01 72.71,74.3 | 72.71,74.3 72.71,68.58 | 72.71,68.58 72.71,62.86 E$162.A | E$163.A 72.71,68.58 | E$164.A 72.71,74.3 | E$165.A 72.71,80.01
S$171
  Top 1.016: 72.71,56.52 72.71,60.33 E$162.K
S$172
  Top 1.016: 70.17,56.52 70.17,58.42 69.22,58.42 69.22,66.04 E$163.K
S$173
  Top 1.016: 67.63,71.75 E$164.K
S$174
  Top 1.016: 65.09,56.52 65.09,77.47 E$165.K
S$175
  Top 1.016: 62.55,56.52 62.55,83.19 E$166.K
S$176
  Top 1.016: 84.14,85.72 85.41,85.72 85.41,80.01 | 85.41,80.01 85.41,74.3 | 85.41,74.3 85.41,68.58 | 85.41,68.58 85.41,62.86 E$168.A | E$169.A 85.41,68.58 | E$170.A 85.41,74.3 | E$171.A 85.41,80.01
S$177
  Top 1.016: 85.41,56.52 85.41,60.33 E$168.K
S$178
  Top 1.016: 82.87,56.52 82.87,58.42 81.92,58.42 81.92,66.04 E$169.K
S$179
  Top 1.016: 80.33,71.75 E$170.K
S$180
  Top 1.016: 77.79,56.52 77.79,77.47 E$171.K
S$181
  Top 1.016: 75.25,56.52 75.25,83.19 E$172.K
S$182
  Top 1.016: 96.84,85.72 98.11,85.72 98.11,80.01 | 98.11,80.01 98.11,74.3 | 98.11,74.3 98.11,68.58 | 98.11,68.58 98.11,62.86 E$174.A | E$175.A 98.11,68.58 | E$176.A 98.11,74.3 | E$177.A 98.11,80.01
S$183
  Top 1.016: 98.11,56.52 98.11,60.33 E$174.K
S$184
  Top 1.016: 95.57,56.52 95.57,58.42 94.62,58.42 94.62,66.04 E$175.K
S$185
  Top 1.016: 93.03,71.75 E$176.K
S$186
  Top 1.016: 90.49,56.52 90.49,77.47 E$177.K
S$187
  Top 1.016: 87.95,56.52 87.95,83.19 E$178.K
S$188
  Top 1.016: 109.54,85.72 110.81,85.72 110.81,80.01 | 110.81,80.01 110.81,74.3 | 110.81,74.3 110.81,68.58 | 110.81,68.58 110.81,62.86 E$180.A | E$181.A 110.81,68.58 | E$182.A 110.81,74.3 | E$183.A 110.81,80.01
S$189
  Top 1.016: 110.81,56.52 110.81,60.33 E$180.K
S$190
  Top 1.016: 108.27,56.52 108.27,58.42 107.32,58.42 107.32,66.04 E$181.K
S$191
  Top 1.016: 105.73,71.75 E$182.K
S$192
  Top 1.016: 103.19,56.52 103.19,77.47 E$183.K
S$193
  Top 1.016: 100.65,56.52 100.65,83.19 E$184.K
S$194
  Top 1.016: 122.24,85.72 123.51,85.72 123.51,80.01 | 123.51,80.01 123.51,74.3 | 123.51,74.3 123.51,68.58 | 123.51,68.58 123.51,62.86 E$186.A | E$187.A 123.51,68.58 | E$188.A 123.51,74.3 | E$189.A 123.51,80.01
S$195
  Top 1.016: 123.51,56.52 123.51,60.33 E$186.K
S$196
  Top 1.016: 120.97,56.52 120.97,58.42 120.02,58.42 120.02,66.04 E$187.K
S$197
  Top 1.016: 118.43,71.75 E$188.K
S$198
  Top 1.016: 115.89,56.52 115.89,77.47 E$189.K
S$199
  Top 1.016: 113.35,56.52 113.35,83.19 E$190.K